# Altium PCB PCB1.PcbDoc (part 1 of 2)
Units mil, origin at the board's own origin, x right, y up, seen from the top; angles counter-clockwise.
Board outline 3622.05 x 2165.35 mil, 2 copper layers (Top Layer, Bottom Layer); 72 components, 72 nets, 343 pads, 123 vias.
Unrouted connection lines stored in the file: 44.
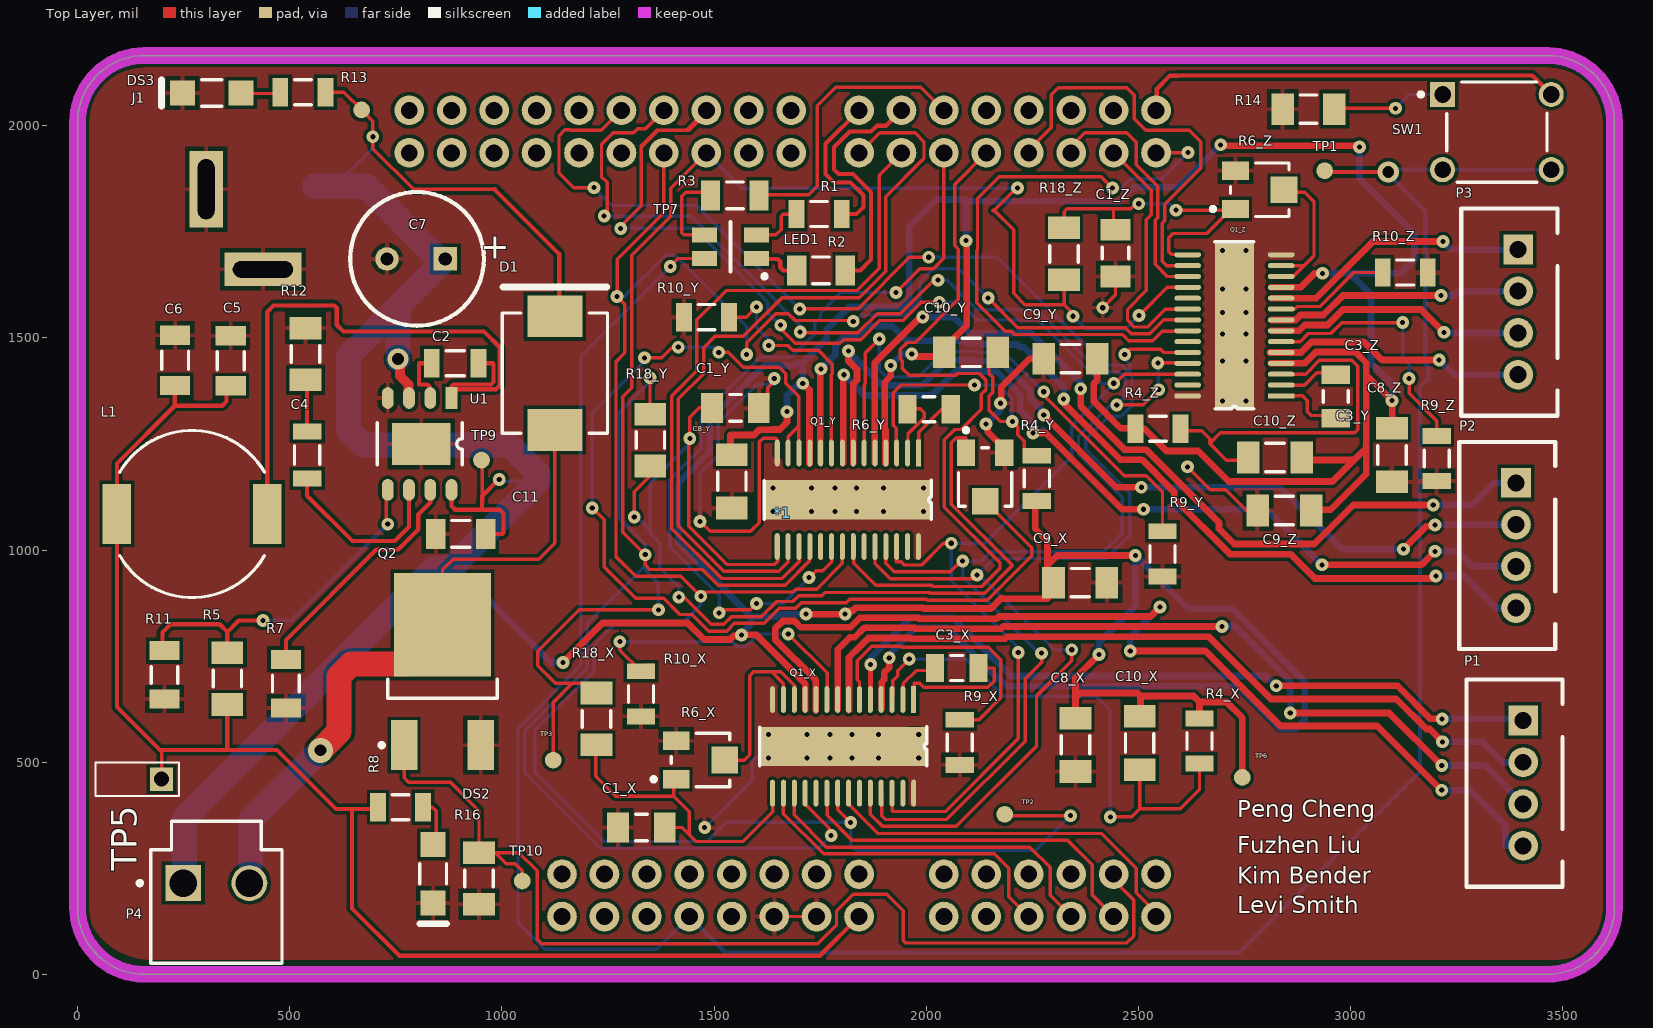
[diagram p0: Top Layer view]
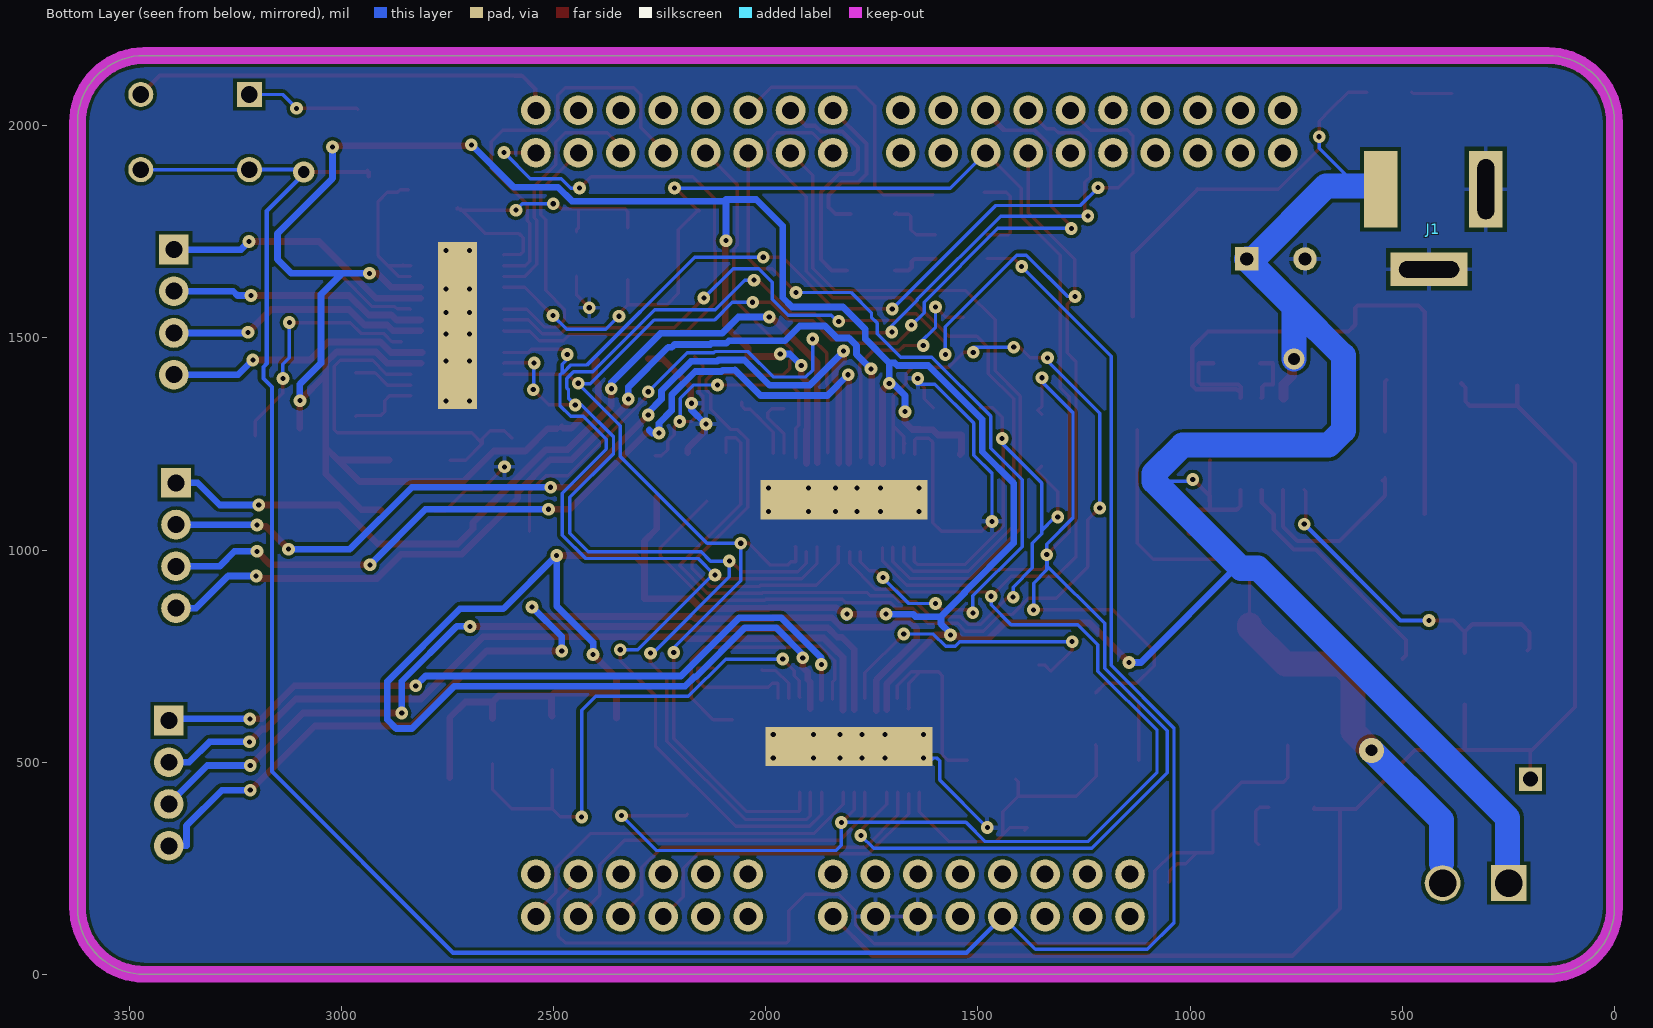
[diagram p1: Bottom Layer view, seen from below]

## Layer stack, top to bottom
Top Solder: solder mask 0.4, Solder Resist, Dk 3.5
Top Layer: signal copper 1.4
Dielectric 1: dielectric 12.6, FR-4, Dk 4.8
Bottom Layer: signal copper 1.4
Bottom Solder: solder mask 0.4, Solder Resist, Dk 3.5

## Board outline
157.48,0 cw(c157.48,157.48) 0,157.48 0,2007.87 cw(c157.48,2007.87) 157.48,2165.35 3464.57,2165.35 cw(c3464.57,2007.87) 3622.05,2007.87 3622.05,157.48 cw(c3464.57,157.48) 3464.57,0

## Design rules (kind name [scope] priority, off if disabled: settings)
BoardOutlineClearance [All] p1: gap=10 ignorepadtopadclearanceinfootprint=FALSE except(0: Arc-SplitContinuation Track-SplitContinuation SMDPad-SplitContinuation THPad-SplitContinuation Via-SplitContinuation Fill-SplitContinuation Poly-SplitContinuation Region-SplitContinuation Text-SplitContinuation)
Clearance [All] p1: gap=8 ignorepadtopadclearanceinfootprint=FALSE
HoleSize [All] p1: absolutevalues=TRUE maxlimit=150 minlimit=11.81 maxpercent=80.000 minpercent=20.000
MinimumAnnularRing [All] p1: minimumring=5.9
MinimumSolderMaskSliver MinimumSolderMaskSliver_1 [HasFootprint('DRV8825 HTSSOP')] p1: minsoldermaskwidth=3
MinimumSolderMaskSliver [All] p2: minsoldermaskwidth=8
PolygonConnect DRV8825 [HasFootprint('DRV8825 HTSSOP') vs InNet('GND')] p1: connectstyle=Direct reliefconductorwidth=10 reliefentries=4 polygonreliefangle="90 Angle" airgapwidth=10
PolygonConnect [All] p2: connectstyle=Relief reliefconductorwidth=10 reliefentries=4 polygonreliefangle="90 Angle" airgapwidth=10
RoutingVias [All] p1: holewidth=12 width=30 viastyle="Through Hole" minholewidth=12 minwidth=30 maxholewidth=12 maxwidth=30
SilkToSilkClearance [All] p1: silktosilkclearance=8
SilkToSolderMaskClearance [IsPad] p1: minsilkscreentomaskgap=4.72 clearancetoexposedcopper=TRUE
SolderMaskExpansion [All] p1: expansion=4
Width [All] p1: maxlimit=70.87 minlimit=6 preferedwidth=8
26 further rules are at their usual default settings.

## Classes and differential pairs
channel class "Stepper Motor Driver": X Y Z
component class Z: C1_Z C3_Z C8_Z C9_Z C10_Z Q1_Z R4_Z R6_Z R9_Z R10_Z R18_Z
component class Y: C1_Y C3_Y C8_Y C9_Y C10_Y Q1_Y R4_Y R6_Y R9_Y R10_Y R18_Y
component class X: C1_X C3_X C8_X C9_X C10_X Q1_X R4_X R6_X R9_X R10_X R18_X
component class Reg: C2 C4 C5 C6 C7 C11 DS2 DS3 J1 L1 R5 R7 R8 R11 R12 R13 TP5 TP6 TP7 U1
component class PWM: D1 P4 Q2 R16 TP9 TP10
component class K22F: *1 LED1 R1 R2 R3 R14 SW1 TP1 TP2 TP3
component class 3_axis_sheld: P1 P2 P3

## Components (designator, comment, footprint, x,y, rotation, side; value= is the part's Value field where it differs from the comment)
*1 "NXP FRDM-K22F" FRDM-K22F 41.73,36.22 r0 top locked
C1_X "1206C474K5RACTU" CAPC3216X100X50NL20T25 1329,346 r180 top (schematic designator C1)
C1_Y "1206C474K5RACTU" CAPC3216X100X50NL20T25 1550.12,1335 r0 top (schematic designator C1)
C1_Z "1206C474K5RACTU" CAPC3216X100X50NL20T25 2446.12,1699.88 r270 top (schematic designator C1)
C2 "CAP 100uF 10V 1206(3216)" CAPC1206(3216)190_L 890,1440 r0 top value=100uF
C3_X "C1206C103K5RACTU" KEMT-1206-2_L 2072,722 r0 top (schematic designator C3)
C3_Y "C1206C103K5RACTU" KEMT-1206-2_L 2007,1332 r0 top (schematic designator C3)
C3_Z "C1206C103K5RACTU" KEMT-1206-2_L 2965,1362 r270 top (schematic designator C3)
C4 "CAP 2.7nF 200V 1206(3216)" CAPC1206(3216)100_L 541,1224 r270 top value=2.7nF
C5 "CAP 22uF 16V 1206(3216)" CAPC1206(3216)190_N 230,1447 r90 top value=22uF
C6 "CAP 22uF 16V 1206(3216)" CAPC1206(3216)190_N 361,1446 r90 top value=22uF
C7 "100uF, 50V" "Capacitor radial 8mm" 867,1686 r180 top
C8_X "CAP 1uF 25V 1206(3216)" CAPC1206(3216)170_M 2352,541.01 r270 top value=1uF (schematic designator C8)
C8_Y "CAP 1uF 25V 1206(3216)" CAPC1206(3216)170_M 1542,1162 r270 top value=1uF (schematic designator C8)
C8_Z "CAP 1uF 25V 1206(3216)" CAPC1206(3216)170_M 3098,1224 r270 top value=1uF (schematic designator C8)
C9_X "CAP 1uF 25V 1206(3216)" CAPC1206(3216)170_M 2363.01,923 r0 top value=1uF (schematic designator C9)
C9_Y "CAP 1uF 25V 1206(3216)" CAPC1206(3216)170_M 2340.01,1451 r180 top value=1uF (schematic designator C9)
C9_Z "CAP 1uF 25V 1206(3216)" CAPC1206(3216)170_M 2844,1093 r180 top value=1uF (schematic designator C9)
C10_X "CAP 1uF 25V 1206(3216)" CAPC1206(3216)170_M 2503,545.01 r90 top value=1uF (schematic designator C10)
C10_Y "CAP 1uF 25V 1206(3216)" CAPC1206(3216)170_M 2106.01,1466 r180 top value=1uF (schematic designator C10)
C10_Z "CAP 1uF 25V 1206(3216)" CAPC1206(3216)170_M 2822,1218 r0 top value=1uF (schematic designator C10)
C11 "CAP 10uF 25V 1206(3216)" CAPC1206(3216)190_N 903,1038 r180 top value=10uF
D1 "S5BC-13-F" DIOD-S5xC_V 1125,1417 r90 top
DS2 "HSMH-C150" AVAG-HSMX-C150_V 838,237 r270 top
DS3 "HSMH-C150" AVAG-HSMX-C150_V 316,2077 r180 top
J1 "Barrel Jack 5.5x2.1mm" "Barrel Jack 2.1x5.5mm THT" 11.81,1850.39 r270 top
L1 "10uH ±20%, 4.3A" "Inductor SMD VLF10045 series" 270,1085 r180 top value=10uH
LED1 "150141M173100" 3528_A 1539,1715 r180 top
P1 "B4B-XH-A (LF)(SN)" "B4B-XH-A (LF)(SN)" 3407,598.28 r270 top
P2 "B4B-XH-A (LF)(SN)" "B4B-XH-A (LF)(SN)" 3390,1158.43 r270 top
P3 "B4B-XH-A (LF)(SN)" "B4B-XH-A (LF)(SN)" 3395,1708.43 r270 top
P4 "B2P-VH(LF)(SN)" JST-B2P-VH(LF)(SN)_V 327.05,159.88 r0 top
Q1_X "DRV8825" "DRV8825 HTSSOP" 1970.67,647.68 r270 top locked (schematic designator Q1)
Q1_Y "DRV8825" "DRV8825 HTSSOP" 1981.67,1228.68 r270 top locked (schematic designator Q1)
Q1_Z "DRV8825" "DRV8825 HTSSOP" 2836.68,1363.15 r180 top locked (schematic designator Q1)
Q2 "NTD6415ANLT4G" ONSC-DPAK-3-369AA-01_V 860,713.35 r90 top
R1 "430R 5% 1206(3216)" RESC1206(3216)_L 1747.85,1792 r0 top value="430.00 Ohm"
R2 "270R 5% 1206(3216)" RESC1206(3216)_N 1752,1659 r0 top value="270.00 Ohm"
R3 "270R 5% 1206(3216)" RESC1206(3216)_N 1549.09,1836 r0 top value="270.00 Ohm"
R4_X "1M 5% 1206(3216)" RESC1206(3216)_L 2644,549.85 r270 top value="1000000.00 Ohm" (schematic designator R4)
R4_Y "1M 5% 1206(3216)" RESC1206(3216)_L 2261,1169 r90 top value="1000000.00 Ohm" (schematic designator R4)
R4_Z "1M 5% 1206(3216)" RESC1206(3216)_L 2546,1286 r0 top value="1000000.00 Ohm" (schematic designator R4)
R5 "62K 5% 1206(3216)" RESC1206(3216)_M 353,697 r270 top value="62000.00 Ohm"
R6_X "3313J-1-503E" BOUR-3313J-1_V 1468,505 r0 top (schematic designator R6)
R6_Y "3313J-1-503E" BOUR-3313J-1_V 2139,1172 r270 top (schematic designator R6)
R6_Z "3313J-1-503E" BOUR-3313J-1_V 2786,1849 r0 top (schematic designator R6)
R7 "180K 5% 1206(3216)" RESC1206(3216)_N 491,685 r270 top value="180000.00 Ohm"
R8 "200R 5% 1206(3216)" RESC1206(3216)_L 761,394 r180 top value="200.00 Ohm"
R9_X "0.2R 5% 1206(3216)" RESC1206(3216)_L 2079,546.85 r270 top value="200.00 Ohm" (schematic designator R9)
R9_Y "0.2R 5% 1206(3216)" RESC1206(3216)_L 2557,991 r270 top value="200.00 Ohm" (schematic designator R9)
R9_Z "0.2R 5% 1206(3216)" RESC1206(3216)_L 3203,1216 r270 top value="200.00 Ohm" (schematic designator R9)
R10_X "0.2R 5% 1206(3216)" RESC1206(3216)_L 1328,661.15 r270 top value="200.00 Ohm" (schematic designator R10)
R10_Y "0.2R 5% 1206(3216)" RESC1206(3216)_L 1482,1549 r180 top value="200.00 Ohm" (schematic designator R10)
R10_Z "0.2R 5% 1206(3216)" RESC1206(3216)_L 3129,1654 r0 top value="200.00 Ohm" (schematic designator R10)
R11 "12K 5% 1206(3216)" RESC1206(3216)_N 205,706 r90 top value="12000.00 Ohm"
R12 "24K 5% 1206(3216)" RESC1206(3216)_M 537,1462 r270 top value="24000.00 Ohm"
R13 "560R 5% 1206(3216)" RESC1206(3216)_L 531,2079 r180 top value="560.00 Ohm"
R14 "10K 5% 1206(3216)" RESC1206(3216)_M 2901,2039 r0 top value="10000.00 Ohm"
R16 "51K 5% 1206(3216)" RESC1206(3216)_M 946,226 r90 top value="51000.00 Ohm"
R18_X "10K 5% 1206(3216)" RESC1206(3216)_M 1223,602 r90 top value="10000.00 Ohm" (schematic designator R18)
R18_Y "10K 5% 1206(3216)" RESC1206(3216)_M 1350,1259 r90 top value="10000.00 Ohm" (schematic designator R18)
R18_Z "10K 5% 1206(3216)" RESC1206(3216)_M 2325,1698 r270 top value="10000.00 Ohm" (schematic designator R18)
SW1 "B3F-1000" OMRON-B3F-1000-4_V 3345,1985 r0 top
TP1 "TP-SM-C-100" TP-SM-C-100 2939,1894 r0 top
TP2 "TP-SM-C-100" TP-SM-C-100 2185,377 r90 top
TP3 "TP-SM-C-100" TP-SM-C-100 1121,505 r90 top
TP5 "TP-TH-C-152-H90" TP-TH-C-152-H90 198,460 r180 top
TP6 "TP-SM-C-100" TP-SM-C-100 2745,464 r90 top
TP7 "TP-SM-C-100" TP-SM-C-100 669.29,2037.15 r90 top
TP9 "TP-SM-C-100" TP-SM-C-100 952,1212 r90 top
TP10 "TP-SM-C-100" TP-SM-C-100 1048,220 r90 top
U1 "RT7272A DC/DC Step-Down Converter" RT7272A 881.26,1358.27 r270 top

## Footprints (in the part's own frame and the unit in brackets; to place one, negate y for a bottom-side part, rotate by r counter-clockwise, add the part's x,y. Pads: shape width x height; smd on the part's side, far side on the other; paste and mask are expansions set on the pad)
3528_A [mm] "Chip LED, 4-Leads, Body 2.8x3.5mm (max), Pitch 1.42mm, IPC Medium Density"
  rect 1.5x0.9 smd: 1(1.55,0.707) 2(1.55,-0.71) 3(-1.55,0.707) 4(-1.55,-0.707)
  silkscreen extent -2.16,-1.5 0.03,1.9, body extent -1.75,-1.4 1.75,1.4, height 1.87
AVAG-HSMX-C150_V [mm] "SMD, 2-Leads, Body 3.2x1.6mm"
  rect 1.5x1.5 smd: 1(-1.75,0) 2(1.75,0)
  silkscreen extent -0.6,-0.8 3,0.8, body extent -1.6,-0.8 1.6,0.8, height 1.1
"B4B-XH-A (LF)(SN)" [mil] "B4B-XH-A (LF)(SN) Wire-To-Board Connector, Vertical, 2.5 mm, 4 Contacts"
  rect 70x70 hole 40: 1(0,0)
  round 70 hole 40: 2(98.43,0) 3(196.85,0) 4(295.28,0)
  silkscreen extent -96,-134 392,93, body extent -97,-134 391,92, height 276
"Barrel Jack 2.1x5.5mm THT" [mm] "GCT DCJ200-10-A-K1-K"
  rect 4.6x2 smd far side mask+0.102: 1(0,13.7)
  rect 4.6x2 hole 1 slot 3.6 at 0 deg: 2(0,7.4)
  rect 2x4.6 hole 1 slot 3.6 at 90 deg: 2(4.8,10.8)
  body extent -4.47,0 5.07,14.3, height 11
BOUR-3313J-1_V [mm] "SMD, 3-Leads, Body 3.5x3.2mm, Pitch 1.15mm"
  rect 1.6x1.1 smd paste+0: 1(-1.45,-1.15) 3(-1.45,1.15)
  rect 1.6x1.6 smd paste+0: 2(1.45,0)
  silkscreen extent -2.92,-1.6 1.75,1.6, body extent -1.75,-1.65 1.75,1.65, height 2.11
"Capacitor radial 8mm" [mm] "Radial electrolytic cap, 8mm body, 3.5mm pin separation"
  rect 1.4x1.4 hole 0.8: 1(0,0)
  round 1.4 hole 0.8: 2(3.5,0)
  silkscreen extent -2.3,-4 5.7,4, body extent -2.2,-4 5.8,4, height 11.5
CAPC1206(3216)100_L [mm] "Chip Capacitor, Body 3.2x1.6mm, Height 1mm, IPC High Density"
  rect 0.95x1.7 smd: 1(-1.4,0) 2(1.4,0)
  silkscreen extent -0.55,-0.75 0.55,0.75, body extent -1.7,-0.9 1.7,0.9, height 1
CAPC1206(3216)170_M [mm] "Chip Capacitor, Body 3.2x1.6mm, Height 1.7mm, IPC Low Density"
  rect 1.35x1.9 smd: 1(-1.6,0) 2(1.6,0)
  silkscreen extent -0.55,-0.85 0.55,0.85, body extent -1.7,-0.9 1.7,0.9, height 1.7
CAPC1206(3216)190_L [mm] "Chip Capacitor, Body 3.2x1.6mm, Height 1.9mm, IPC High Density"
  rect 0.95x1.7 smd: 1(-1.4,0) 2(1.4,0)
  silkscreen extent -0.55,-0.75 0.55,0.75, body extent -1.7,-0.9 1.7,0.9, height 1.9
CAPC1206(3216)190_N [mm] "Chip Capacitor, Body 3.2x1.6mm, Height 1.9mm, IPC Medium Density"
  rect 1.15x1.8 smd: 1(-1.5,0) 2(1.5,0)
  silkscreen extent -0.55,-0.8 0.55,0.8, body extent -1.7,-0.9 1.7,0.9, height 1.9
CAPC3216X100X50NL20T25 [mm] "Chip Capacitor, 2-Leads, Body 3.20x1.60mm, IPC Medium Density"
  rect 1.3x1.8 smd: 1(-1.4,0) 2(1.4,0)
  silkscreen extent -0.35,-0.8 0.35,0.8, body extent -1.7,-0.9 1.7,0.9, height 1
DIOD-S5xC_V [mm] "Molded Diode, 2-Leads, Body 7.11x6.22mm"
  rect 2.5x3.3 smd: 1(-3.4,0) 2(3.4,0)
  silkscreen extent -3.6,-3.15 5.15,3.15, body extent -3.77,-3.11 3.77,3.11, height 2.5
"DRV8825 HTSSOP" [mm]
  rect 1.6x0.3 smd paste+0 mask+0.07: 1(0,0)
  oval 1.6x0.3 smd paste+0 mask+0.07: 2(0,-0.65) 3(0,-1.3) 4(0,-1.95) 5(0,-2.6) 6(0,-3.25) 7(0,-3.9) 8(0,-4.55) 9(0,-5.2) 10(0,-5.85) 11(0,-6.5) 12(0,-7.15) 13(0,-7.8) 14(0,-8.45) 15(5.6,-8.45) 16(5.6,-7.8) 17(5.6,-7.15) 18(5.6,-6.5) 19(5.6,-5.85) 20(5.6,-5.2) 21(5.6,-4.55) 22(5.6,-3.9) 23(5.6,-3.25) 24(5.6,-2.6) 25(5.6,-1.95) 26(5.6,-1.3) 27(5.6,-0.65) 28(5.6,0)
  round 0.6 hole 0.3: PPAD(2.1,0.3) PPAD(2.1,-2.1) PPAD(2.1,-3.7) PPAD(2.1,-6.4) PPAD(2.1,-5) PPAD(2.1,-8.7) PPAD(3.5,0.3) PPAD(3.5,-5) PPAD(3.5,-3.7) PPAD(3.5,-2.1) PPAD(3.5,-8.7) PPAD(3.5,-6.4)
  rect 2.34x5.18 smd paste+0: PPAD(2.8,-4.225)
  rect 2.34x10 smd paste-100 mask-100: PPAD(2.8,-4.225)
  rect 2.34x10 smd far side paste-100 mask-100: PPAD(2.8,-4.225)
  Top Layer region: 1.1,0.9
  silkscreen extent 1.63,-9.23 3.98,0.77, body extent -0.65,-9.34 6.25,0.87, height 1.11
FRDM-K22F [mil] "NXP FRDM-K22F development board"
  round 70 hole 40: J1_1(2500,1900) J1_2(2500,2000) J1_3(2400,1900) J1_4(2400,2000) J1_5(2300,1900) J1_6(2300,2000) J1_7(2200,1900) J1_8(2200,2000) J1_9(2100,1900) J1_10(2100,2000) J1_11(2000,1900) J1_12(2000,2000) J1_13(1900,1900) J1_14(1900,2000) J1_15(1800,1900) J1_16(1800,2000) J2_1(1640,1900) J2_2(1640,2000) J2_3(1540,1900) J2_4(1540,2000) J2_5(1440,1900) J2_6(1440,2000) J2_7(1340,1900) J2_8(1340,2000) J2_9(1240,1900) J2_10(1240,2000) J2_11(1140,1900) J2_12(1140,2000) J2_13(1040,1900) J2_14(1040,2000) J2_15(940,1900) J2_16(940,2000) J2_17(840,1900) J2_18(840,2000) J2_19(740,1900) J2_20(740,2000) J24_1(2000,200) J24_2(2000,100) J24_3(2100,200) J24_4(2100,100) J24_5(2200,200) J24_6(2200,100) J24_7(2300,200) J24_8(2300,100) J24_9(2400,200) J24_10(2400,100) J24_11(2500,200) J24_12(2500,100) J25_1(1100,200) J25_2(1100,100) J25_3(1200,200) J25_4(1200,100) J25_5(1300,200) J25_6(1300,100) J25_7(1400,200) J25_8(1400,100) J25_9(1500,200) J25_10(1500,100) J25_11(1600,200) J25_12(1600,100) J25_13(1700,200) J25_14(1700,100) J25_15(1800,200) J25_16(1800,100)
  body extent 690,50 2550,2050, height 335
"Inductor SMD VLF10045 series" [mm]
  rect 1.7x3.6 smd: 1(-4.5,0) 2(4.5,0)
  silkscreen extent -4.33,-5 4.33,5, body extent -5.2,-5 5.2,5.1, height 4.7
JST-B2P-VH(LF)(SN)_V [mm] "THD, 2-Leads, Body 8.5x7.86mm, Pitch 3.96mm"
  rect 2.15x2.15 hole 1.65: 1(-1.98,1.4)
  round 2.15 hole 1.65: 2(1.98,1.4)
  silkscreen extent -4.7,-3.4 3.93,5.1, body extent -3.93,-3.2 3.93,5.3, height 10.9
KEMT-1206-2_L [mm] "SMD, 2-Leads, Body 3.4x1.8mm, IPC High Density"
  rect 1.1x1.7 smd: 1(-1.3,0) 2(1.3,0)
  silkscreen extent -0.35,-0.75 0.35,0.75, body extent -1.7,-0.9 1.7,0.9, height 0.88
OMRON-B3F-1000-4_V [mm] "TH, 4-Leads, Body 6x6mm"
  rect 1.5x1.5 hole 1 paste+0: 1(-3.25,2.25)
  round 1.5 hole 1 paste+0: 2(3.25,2.25) 3(-3.25,-2.25) 4(3.25,-2.25)
  silkscreen extent -4.67,-3 3,3, body extent -3,-3 3,3, height 4.5
ONSC-DPAK-3-369AA-01_V [mm] "DPAK, 3-Leads, Body 6.54x6.095mm, Pitch 2.29mm"
  rect 3x1.6 smd: 1(-4.4,2.29) 3(-4.4,-2.29)
  rect 6.2x5.8 smd: 4(2.8,0)
  silkscreen extent -4.52,-3.27 -0.45,3.76, body extent -1.6,-3.27 4.49,3.27, height 2.47
RESC1206(3216)_L [mm] "Chip Resistor, Body 3.2x1.6mm, IPC High Density"
  rect 0.95x1.7 smd: 1(-1.35,0) 2(1.35,0)
  silkscreen extent -0.5,-0.75 0.5,0.75, body extent -1.67,-0.87 1.67,0.87, height 0.75
RESC1206(3216)_M [mm] "Chip Resistor, Body 3.2x1.6mm, IPC Low Density"
  rect 1.35x1.9 smd: 1(-1.55,0) 2(1.55,0)
  silkscreen extent -0.5,-0.85 0.5,0.85, body extent -1.67,-0.87 1.67,0.87, height 0.75
RESC1206(3216)_N [mm] "Chip Resistor, Body 3.2x1.6mm, IPC Medium Density"
  rect 1.15x1.8 smd: 1(-1.45,0) 2(1.45,0)
  silkscreen extent -0.5,-0.8 0.5,0.8, body extent -1.67,-0.87 1.67,0.87, height 0.75
RT7272A [mm]
  rect 1.3x0.7 smd: 1(0,0)
  oval 1.3x0.7 smd: 2(0,-1.27) 3(0,-2.54) 4(0,-3.81) 5(5.5,-3.81) 6(5.5,-2.54) 7(5.5,-1.27) 8(5.5,0)
  rect 2.5x3.5 smd: PAD(2.75,-1.81)
  silkscreen extent 1.48,-4.44 4.02,0.64, body extent -0.35,-4.41 5.85,0.59, height 1.95
TP-SM-C-100 [mm] "Test Point, Surface Mounting, Circular, Pad Diameter 1mm"
  round 1 smd: 1(0,0)
TP-TH-C-152-H90 [mil] "Test Point, Through Hole, Hole Size 0.9mm, PCB Mount with Silkscreen Box"
  rect 55x55 hole 35.43 paste+0 mask+4: 1(0,0)
  silkscreen extent -41,-39 156,39

## Part data
C1_X C1_Y C1_Z: library part CMP-2000-06016-1, "Chip Capacitor, 470 nF, +/- 10%, 50 V, -55 to 125 degC, 1206 (3216 Metric), RoHS, Tape and Reel", Capacitance=0.47uF, Capacitance - nF=470nF, Capacitance - pF=470000pF, Case Code - in=1206, Case Code - mm=3216, Case Height=0.9mm, Case Length=3.2mm, Case Width=1.6mm, Dielectric=X7R, Manufacturer=Kemet, Maximum Operating Temperature=+125C, Minimum Operating Temperature=-55C, Operating Temperature Range=-55Cto+125C, Package / Case=1206(3216metric), Package Description="2-Pin Surface Mount Device, Body 3.2 x 1.6 mm", Temperature Coefficient / Code=+/-15%, Tolerance=10%, Voltage Rating=50V, =C1206C474K5RAC7800, Brand=Kemet, Class=2, Datasheet URL=http://www.kemet.com/docfinder?Partnumber=C1206C106K8RACTU, Datasheet Version=02/2016, Dimensions=1.6mmWx3.2mmLx0.9mmH, Factory Pack Quantity=4000, Manufacturer URL=http://www.kemet.com/, Mounting Technology=SurfaceMount, Package Reference=1206, Packaging=Reel, Product=GeneralTypeMLCCs, Product Category=MultilayerCeramicCapacitorsMLCC-SMD/SMT, RoHS=Details, Series=C1206C, Termination Style=SMD/SMT, Type=SMDMLCCsX7R,Commercial, Voltage Rating DC=50V
C2: library part CMP-1037-05006-1, "CAP 100uF 10V ±20% 1206 (3216 Metric) Thickness 1.9mm SMD", Case-EIA=1206, Case-Metric=3216, Rated Voltage="10 V", Tolerance=±20%, Max Thickness="1.9 mm", Technology=SMT
C3_X C3_Y C3_Z: library part CMP-2000-06008-1, "Surface Mount Multilayer Ceramic Chip Capacitor, X7R Dielectric, 50 V, -55 to 125 degC, 2-Pin SMD (1206), RoHS, Tape and Reel", Capacitance=0.01uF, Case Size=1206(3216mm), Manufacturer=Kemet, Package Description="2-Leads SMD, Body 3.2 x 1.6 mm", Package Reference=1206-2, Temperature Coefficient=X7R, Tolerance=10%, Voltage Rating=50V, Brand/Series=CSeries, Datasheet URL=https://datasheet.ciiva.com/7729/1725435-7729792.pdf, Datasheet Version=07/2013, Dimensions="0.126\"x0.063\"(3.2x1.6mm)LxW", Manufacturer URL=http://www.kemet.com/, Material, Element=Ceramic, Mounting Technology=SurfaceMount, Mounting Type=PCB, Termination=SMD
C4: library part CMP-1037-02898-1, "CAP 2.7nF 200V ±5% 1206 (3216 Metric) Thickness 1mm SMD", Case-EIA=1206, Case-Metric=3216, Rated Voltage="200 V", Tolerance=±5%, Max Thickness="1 mm", Technology=SMT
C5 C6: library part CMP-1037-04992-1, "CAP 22uF 16V ±10% 1206 (3216 Metric) Thickness 1.9mm SMD", Case-EIA=1206, Case-Metric=3216, Rated Voltage="16 V", Tolerance=±10%, Max Thickness="1.9 mm", Technology=SMT
C7: library part "Cap 100uF, 50V, THT radial", "Electrolytic Capacitor, 100 µF, 50 V, ± 20%, Radial Leaded, 8 mm"
C8_X C8_Y C8_Z C9_X C9_Y C9_Z C10_X C10_Y C10_Z: library part CMP-1037-04701-1, "CAP 1uF 25V ±10% 1206 (3216 Metric) Thickness 1.7mm SMD", Case-EIA=1206, Case-Metric=3216, Rated Voltage="25 V", Tolerance=±10%, Max Thickness="1.7 mm", Technology=SMT
C11: library part CMP-1037-04980-1, "CAP 10uF 25V ±20% 1206 (3216 Metric) Thickness 1.9mm SMD", Case-EIA=1206, Case-Metric=3216, Rated Voltage="25 V", Tolerance=±20%, Max Thickness="1.9 mm", Technology=SMT
D1: library part CMP-2000-07025-1, "Surface Mount Glass Passivated Rectifier, 5 A, 100 V, -65 to 150 degC, 2-Pin SMC, RoHS, Tape and Reel", Average Rectified Current-Max=5A, Forward Voltage=1.15V, Manufacturer="Diodes Inc", Package Description="2-Pin Molded Component, Body 6.855 x 5.905 mm", Package Reference=S5xC, Peak Current-Max=100A, Reverse Current-Max=10µA, Reverse Voltage-Max [Vrrm]=100V, Datasheet URL=http://www.diodes.com/_files/datasheets/ds16007.pdf, Datasheet Version="Rev. 9-2, 09/2010", Manufacturer URL=http://www.diodes.com/, Mounting Technology=SurfaceMount
DS2 DS3: library part CMP-2000-06426-1, "LED Uni-Color Red, 65 mW, 25 mA, -40 to 85 degC, 2-Pin SMD, RoHS, Tape and Reel", Emitting Color=Red, Forward Current=25mA, Forward Voltage=2.6V, Manufacturer=Avago, Operating Temperature Classification=Industrial, Operating Temp Range=-40Cto85C, Package Description="2-Pin Surface Mount Device, Body 3.2 x 1.6 mm", Package Reference=HSMX-C150, Package Type=ChipLed, Power Dissipation=78W, Reverse Voltage=5V, Test Current (It)=20mA, Chip Material=GaAlAs, Datasheet URL=http://media.digikey.com/pdf/Data%20Sheets/Avago%20PDFs/HSMz-Czzz.pdf, Datasheet Version=03/2012, DELETED=Compliant, Dominant Wave Length=639nm, High Brightness=No, Lens Dimensions=2x1.6x0.6mm, Lens Type=ColorlessDiffused, Luminous Intensity=17mcd, Lum Intensity=17mcd, Main Category=ChipLED, Manufacturer URL=http://www.avagotech.com/, Mounting=SurfaceMount, Mounting Technology=SurfaceMount, Number of  Elements=1, Packaging=TapeandReel, Peak Wavelength=660nm, Pin Count=2, Product Depth (mm)=1.6mm, Product Height (mm)=1.1mm, Product Length (mm)=3.2mm, Rad Hardened=No, Shape Type=Rectangular, Type=Uni-Color, Viewing Angle=170deg
J1: "GCT DCJ200-10-A-K1-K"
L1: library part "Inductor SMD VLF10045T-100M4R3 10uH", "Inductor SMD - 10uH, 4.3A, ±20%"
LED1: library part CMP-1431-00001-1, "SMD Full-Color Top LED, WL-SFTW, Red & Green & Blue", Color="Red & Green & Blue", Manufacturer="Wuerth Elektronik", ComponentLink1Description="Manufacturer URL", ComponentLink1URL=http://www.we-online.com, ComponentLink2Description=Datasheet, ComponentLink2URL=http://katalog.we-online.com/led/datasheet/150141M173100.pdf, PackageReference=3528_A, PartNumber=150141M173100
P1 P2 P3: library part "B4B-XH-A (LF)(SN) Wire-to-board connector", "Wire-to-board connector, vertical, 2.5mm, 4 contacts"
P4: library part CMP-1755-00002-1, "Male Header, Pitch 3.96 mm, 1 x 2 Position, Height 10.9 mm, Tail Length 3.7 mm, -25 to 85 degC, RoHS, Bulk", Capacitance="27 pF", Case/Package=0603, Case Code (Metric)=1608, Max Operating Temperature=125degC, Min Operating Temperature=-55degC, Package Quantity=4000, Resistance="100000000000 Ohm", Tolerance=5%, Type (Capacitors)=C0G, Voltage Rating="50 V", Case Code (Imperial)=0603, ComponentLink1Description="Manufacturer URL", ComponentLink1URL=http://www.jst.com/home2.html, ComponentLink2Description=Datasheet, ComponentLink2URL=http://www.jst-mfg.com/product/pdf/eng/eVH.pdf, DatasheetVersion=May-16, Height="0.8 mm", Length="1.6 mm", Mount="Surface Mount", PackageDescription="Male Header, Pitch 3.96 mm, 1 x 2 Position, Height 10.9 mm, Tail Length 3.7 mm", PackageReference=B2P-VH(LF)(SN), Packaging="Tape and Reel", Pins=2, Radiation Hardening=No, REACH SVHC="No SVHC", RoHSCompliant=True, Voltage Rating (DC)="50 V", Width="0.8 mm"
Q1_X Q1_Y Q1_Z: library part "Stepper motor driver DRV8825", "TI DRV8825 Stepper Motor Controller IC"
Q2: library part CMP-1058-00352-1, "N-Channel Power MOSFET, 100 V, 23 A, 56 mOhm, 3-Pin DPAK, Pb-Free, Tape and Reel", Manufacturer="On Semiconductor", Package Type=DPAK-3, Channel Polarity="N Channel", Ciss Typ (pF)=1024, ComponentLink1Description="Manufacturer URL", ComponentLink1URL=http://www.onsemi.com/, ComponentLink2Description=Datasheet, ComponentLink2URL=http://www.onsemi.cn/pub_link/Collateral/NTD6415ANL-D.PDF, ComponentLink3Description="Package Specification", ComponentLink3URL=http://www.onsemi.cn/pub_link/Collateral/369AA.PDF, Configuration=Single, Coss Typ (pF)=156, Crss Typ (pF)=70, DatasheetVersion="Rev. 1", ID Max (A)=23, Mounting Technology="Surface Mount", PackageDescription="3-Pin Flange Mount, Body 6.54 x 6.095 mm, Pitch 2.29 mm", PackageReference=DPAK-3-369AA-01, PackageVersion="Rev. B, 06/2010", Packing="Tape and Reel", PartNumber=NTD6415ANLT4G, PD Max (W)=83, Qrr Typ (nC)=152, RoHS=Pb-Free, VGS(th) Max (V)=2, VGS Max (V)=20
R1: library part CMP-1014-00065-1, "430R 0.25W 5% 1206 (3216 Metric)  SMD", Case-EIA=1206, Case-Metric=3216, Power="0.25 W", Tolerance="5 %", Technology=SMT
R2 R3: library part CMP-1014-00060-1, "270R 0.25W 5% 1206 (3216 Metric)  SMD", Case-EIA=1206, Case-Metric=3216, Power="0.25 W", Tolerance="5 %", Technology=SMT
R4_X R4_Y R4_Z: library part CMP-1014-00146-1, "1M 0.25W 5% 1206 (3216 Metric)  SMD", Case-EIA=1206, Case-Metric=3216, Power="0.25 W", Tolerance="5 %", Technology=SMT
R5: library part CMP-1014-00117-1, "62K 0.25W 5% 1206 (3216 Metric)  SMD", Case-EIA=1206, Case-Metric=3216, Power="0.25 W", Tolerance="5 %", Technology=SMT
R6_X R6_Y R6_Z: library part CMP-2000-05588-1, "3 mm Trimpot(R) Trimming Potentiometer, 50 KOhm, +/- 20%, 0.125 W, -55 to 125 degC, 3-Pin SMD, RoHS, Tape and Reel", Manufacturer=Bourns, Package Description="3-Pin Surface Mount Device, Body 3.5 x 3.2 mm, Pitch 1.15 mm", Package Reference=3313J-1, Power Rating=125mW, Resistance Tolerance=±20%, Temperature Coefficient=±150ppm/°C, Track Resistance=50kohm, Datasheet URL=http://www.bourns.com/docs/Product-Datasheets/3313.pdf, Datasheet Version=05/2016, Manufacturer URL=http://www.bourns.com/, Mounting Technology=SurfaceMount, No. of Turns=1, Potentiometer Mounting=SMD, SVHC=NoSVHC(19-Dec-2012)
R7: library part CMP-1014-00128-1, "180K 0.25W 5% 1206 (3216 Metric)  SMD", Case-EIA=1206, Case-Metric=3216, Power="0.25 W", Tolerance="5 %", Technology=SMT
R8: library part CMP-1014-00057-1, "200R 0.25W 5% 1206 (3216 Metric)  SMD", Case-EIA=1206, Case-Metric=3216, Power="0.25 W", Tolerance="5 %", Technology=SMT
R9_X R9_Y R9_Z R10_X R10_Y R10_Z: library part CMP-1014-00057-1, "0.2R 0.25W 5% 1206 (3216 Metric)  SMD", Case-EIA=1206, Case-Metric=3216, Power="0.25 W", Tolerance="5 %", Technology=SMT
R11: library part CMP-1014-00100-1, "12K 0.25W 5% 1206 (3216 Metric)  SMD", Case-EIA=1206, Case-Metric=3216, Power="0.25 W", Tolerance="5 %", Technology=SMT
R12: library part CMP-1014-00107-1, "24K 0.25W 5% 1206 (3216 Metric)  SMD", Case-EIA=1206, Case-Metric=3216, Power="0.25 W", Tolerance="5 %", Technology=SMT
R13: library part CMP-1014-00068-1, "560R 0.25W 5% 1206 (3216 Metric)  SMD", Case-EIA=1206, Case-Metric=3216, Power="0.25 W", Tolerance="5 %", Technology=SMT
R14 R18_X R18_Y R18_Z: library part CMP-1014-00098-1, "10K 0.25W 5% 1206 (3216 Metric)  SMD", Case-EIA=1206, Case-Metric=3216, Power="0.25 W", Tolerance="5 %", Technology=SMT
R16: library part CMP-1014-00115-1, "51K 0.25W 5% 1206 (3216 Metric)  SMD", Case-EIA=1206, Case-Metric=3216, Power="0.25 W", Tolerance="5 %", Technology=SMT
SW1: library part CMP-1677-00002-1, "Tactile Switch, SPST-NO, 0.05 A, 5 to 24 V, -25 to 70 degC, 4-Pin THD, RoHS, Bulk", Capacitance="-45 f", Current Rating="1.5 A", Max Operating Temperature="70 degC", Min Operating Temperature="-40 degC", Package Quantity=1080, Voltage Rating="150 V", ComponentLink1Description="Manufacturer URL", ComponentLink1URL=http://www.omron.com/, ComponentLink2Description=Datasheet, ComponentLink2URL=http://www.omron.com/ecb/products/pdf/en-b3f.pdf, Contact Material=Brass, Contact Plating=Gold, DatasheetVersion=Jan-15, Gender=Female, Height="14.99 mm", Lead Pitch="1.27 mm", Length="18.34 mm", Mount="Through Hole", PackageDescription="4-Pin Through Hole Device, Body 6 x 6 mm", PackageReference=B3F-1000, Packaging=Tray, Pins=8, Radiation Hardening=No, RoHSCompliant=true, Shielding=Shielded, Width="25.4 mm"
TP1 TP2 TP3 TP6 TP7 TP9 TP10: library part CMP-0484-00002-2, "Test Point, Surface Mount, Circular, Pad Diameter 1 mm", Manufacturer="No Vendor", PartNumber=TP-SM-C-100
TP5: library part CMP-0484-00003-2, "Test Point, Through Hole, Hole Size 0.9 mm, PCB Mount with Silkscreen Box", Manufacturer="No Vendor", PartNumber=TP-TH-C-152-H90
U1: "RIchtek RT7272A 3A, 36V, 500kHz Synchronous Step-Down Converter"

## Via types
v1: diameter 30, hole 12, Top Layer to Bottom Layer, 120 vias
v2: diameter 50, hole 28, Top Layer to Bottom Layer, 2 vias
v3: diameter 59.06, hole 27.99, Top Layer to Bottom Layer, 1 vias

## Nets (pads, with @x,y where several pads share a name; then routed paths per layer and width w, separated by ;. In a path a pad name is that pad's centre, name@x,y a point inside that pad or via, vN(x,y) a via of type N, cw(c..) or ccw(c..) an arc to the next point about the centre after c; other vN are vias at no path point)
3.3v: *1.J25_8 LED1.1 SW1.3 SW1.4 TP1.1 | length 6219.2
  Top Layer w8: v1(1397,1668) 1416.15,1687.15 LED1.1@1477.98,1687.15
  Top Layer w10: TP1.1@2936,1880 2936,1891 TP1.1@2939,1894 2942,1891 v2(3089,1891) ; SW1.3@3217.05,1896.42 SW1.3@3221.58,1896.42 ; SW1.3@3219,1899 SW1.3@3221.58,1896.42 ; SW1.3@3227,1891 SW1.3@3221.58,1896.42
  Bottom Layer w8: v1(1397,1668) 1185.69,1456.69 1185.69,728 1038,580.31 1038,122 1101,59 1364.51,59 *1.J25_8@1441.73,136.22 ; SW1.3@3217.05,1896.42 SW1.4@3472.95,1896.42
  Bottom Layer w9.84: v2@3094.42,1896.42 SW1.3@3217.05,1896.42
  Bottom Layer w10: *1.J25_8@1441.73,136.22 1526.95,51 2737,51 3164,478 3164,1384.5 3184,1404.5 3184,1431.6 3176,1439.6 3176,1799 3086.5,1888.5 v2@3078.29,1896.71 ; v2(3089,1891) v2@3094.42,1896.42
3.3v_X: C1_X.1 Q1_X.15 R6_X.1 R18_X.1 | length 1011.5
  Top Layer w8: R18_X.1@1223,540.98 1221,538.98 1221,467 1268,420 1405,420 ; C1_X.1@1390.12,340 C1_X.1@1384.12,346 1424.82,346 1442,328.82 ; R6_X.1@1410.91,459.72 1405,453.81 1405,420 ; Q1_X.15@1638.66,429.76 1638.66,383.66 ; 1405,420 1442,383 1442,328.82 ; 1442,328.82 1457.82,313 ; 1442,328.82 1457.82,313 ; 1457.82,313 1568,313 ; 1457.82,313 1568,313 ; 1568,313 1638.66,383.66 ; 1568,313 1638.66,383.66
3.3v_Y: C1_Y.1 Q1_Y.15 R6_Y.1 R18_Y.1 | length 2532.4
  Top Layer w8: v1(1312,1078.02) 1312,1137.02 1361.48,1186.5 R18_Y.1@1350,1197.98 ; v1(1417,889) 1429.82,889 1493.82,825 1523.18,825 1541.18,843 1611.6,843 1647.35,878.75 1685.94,878.75 1699.19,892 1753.81,892 1761.8,899.99 2006.79,899.99 2008.78,898 2137.81,898 2203.41,963.59 2059,1108 2059,1253.17 2070.41,1264.58 2093.72,1264.58 R6_Y.1@2093.72,1229.09 ; C1_Y.1@1495,1335 1465.44,1335 1443,1312.56 v1(1443,1263) 1440,1260 1440,1055.82 1529.82,966 1643,966 1650,973 Q1_Y.15@1650,1007.2
  Bottom Layer w8: v1@1318,1078 1318,1075 1321,1075 1350,1046 ; v1(1417,889) 1417,912.56 1371.78,957.78 1371.78,1016.22 1350,1038 1350,1046 ; v1(1443,1263) 1443,1251 1350,1158 1350,1046
3.3v_Z: C1_Z.1 Q1_Z.15 R6_Z.1 R18_Z.1 | length 782.7
  Top Layer w8: R18_Z.1@2325,1759.02 2325,1797.6 2331.4,1804 2441.43,1804 ; C1_Z.1@2446.12,1749.88 C1_Z.1@2446.12,1755 2441.43,1759.69 2441.43,1804 ; v1(2501,1816) 2494.55,1816 2482.55,1804 2441.43,1804 ; v1(2589,1801) 2719.64,1801 2725.64,1807 R6_Z.1@2728.91,1803.72 2719.07,1803.72 2661.35,1746 2581.69,1746 2572,1736.31 2572,1702.69 2578.13,1696.56 2616.48,1696.56 Q1_Z.15@2617.2,1695.83
  Bottom Layer w8: v1(2501,1816) 2574,1816 v1(2589,1801)
5v: *1.J25_16 C5.1 C6.1 L1.2 R5.2 R8.2 TP5.1 | length 3396.7
  Top Layer w8: TP5.1@198,460 198,525 198,529 ; R8.2@707.85,389.7 R8.2@707.85,394
  Top Layer w10: 198,525 92.83,630.17 L1.2@92.83,1085 92.83,1203.83 229,1340 ; 198,529 353,529 ; C5.1@229,1386.94 229,1340 ; R5.2@353,635.98 353,529 ; C6.1@361,1392.94 351,1382.94 351,1350 341,1340 229,1340 ; R8.2@707.85,389.7 647,389.7 ; *1.J25_16@1841.73,136.22 1749.19,43.68 758.63,43.68 647,155.31 647,389.7 ; 353,529 470,529 609.3,389.7 647,389.7